# Altium PCB PCB2.PcbDoc
Units mil, origin at the board's own origin, x right, y up, seen from the top; angles counter-clockwise.
Board outline 2755.91 x 590.55 mil, 2 copper layers (Top Layer, Bottom Layer); 17 components, 19 nets, 68 pads, 14 vias.
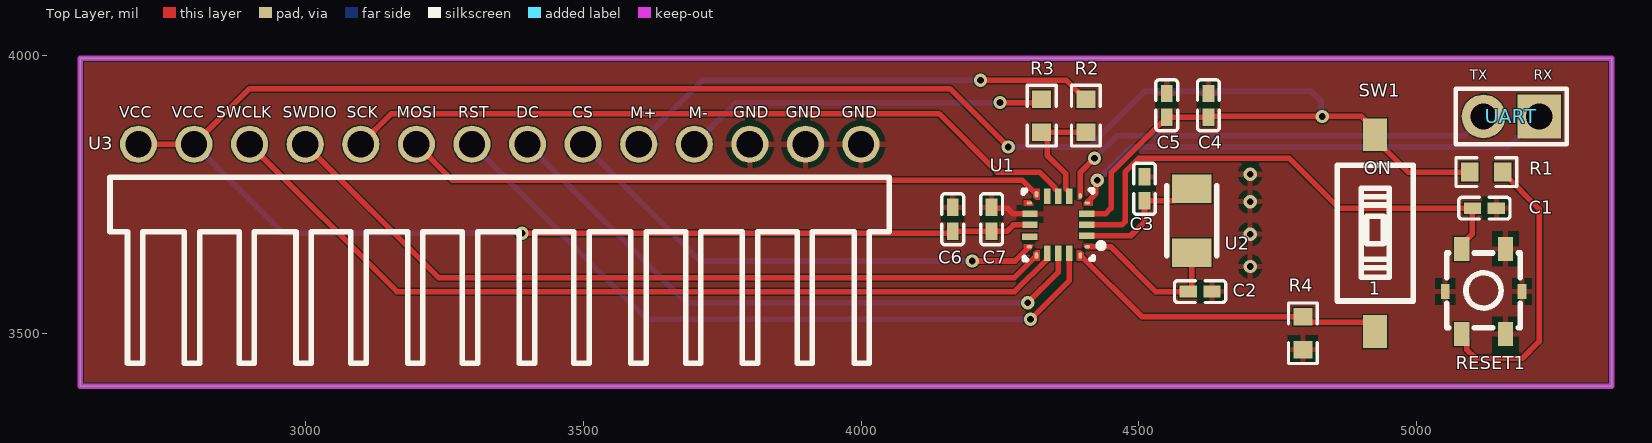
[diagram p0: Top Layer view]
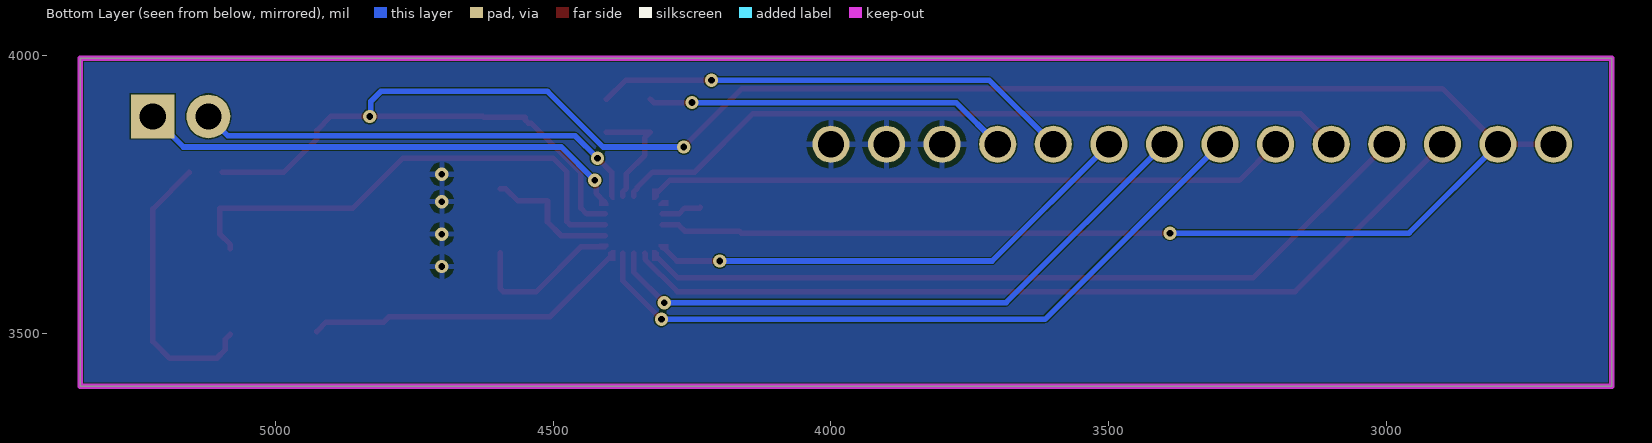
[diagram p1: Bottom Layer view, seen from below]

## Layer stack, top to bottom
Top Solder: solder mask 0.4, Solder Resist, Dk 3.5
Top Layer: signal copper 1.4
Dielectric 1: dielectric 12.6, FR-4, Dk 4.8
Bottom Layer: signal copper 1.4
Bottom Solder: solder mask 0.4, Solder Resist, Dk 3.5

## Board outline
2595,3404.45 2595,3995 5350.91,3995 5350.91,3404.45

## Design rules (kind name [scope] priority, off if disabled: settings)
Clearance [All] p1: gap=2 ignorepadtopadclearanceinfootprint=FALSE
PolygonConnect [All] p1: connectstyle=Relief reliefconductorwidth=10 reliefentries=4 polygonreliefangle="90 Angle" airgapwidth=10
RoutingVias [All] p1: holewidth=28 width=50 viastyle="Through Hole" minholewidth=28 minwidth=50 maxholewidth=28 maxwidth=50
SolderMaskExpansion [All] p1: expansion=4 istentingtop=FALSE
Width [All] p1: maxlimit=10 minlimit=10 preferedwidth=10
30 further rules are at their usual default settings.

## Components (designator, comment, footprint, x,y, rotation, side; value= is the part's Value field where it differs from the comment)
C1 "100nF" C0402 5121.46,3725 r180 top
C2 "9pF" C0402 4610,3575 r180 top
C3 "9pF" C0402 4510,3760 r270 top
C4 "100nF" C0402 4625,3910 r270 top
C5 "1uF" C0402 4550,3910 r270 top
C6 "100nF" C0402 4165,3705 r270 top
C7 "10uF" C0402 4235,3705 r270 top
R1 "10K" R0603 5125,3790 r180 top
R2 "47K" R0603 4404.54,3891.48 r90 top
R3 "22K" R0603 4325,3891.48 r270 top
R4 "10K" R0603 4795,3500 r90 top
RESET1 "Button_5P" Button_3.3x3.3mm 5120,3575 r90 top
SW1 "Switch" Switch 4925,3680 r90 top
U1 "STM32L011F4U6TR" STM32L011F4 4355,3695 r0 top
U2 "FC-135 32.7680KA-AC" CRYSTAL-SMD_L3.2-W1.5 4595,3702.4 r270 top
U3 "Pin_1*14" Pin_1*14 3350,3840 r0 top
UART "Pin_1x2" Pin1x2_2.54mm 5170,3890 r180 top

## Footprints (in the part's own frame and the unit in brackets; to place one, negate y for a bottom-side part, rotate by r counter-clockwise, add the part's x,y. Pads: shape width x height; smd on the part's side, far side on the other; paste and mask are expansions set on the pad)
Button_3.3x3.3mm [mm]
  rect 1.1x0.7 smd: 1(-1.95,1) 2(1.95,1) 3(-1.95,-1) 4(1.95,-1)
  rect 0.7x0.4 smd: 5(0,1.755) 5(0,-1.755)
  silkscreen extent -1.65,-1.67 1.76,1.68
C0402 [mm]
  rect 0.79x0.54 smd paste-100 mask+0.051: 1(-0.545,0) 2(0.545,0)
  silkscreen extent -1.17,-0.5 1.17,0.5, body extent -0.5,-0.25 0.5,0.25, height 0.25
CRYSTAL-SMD_L3.2-W1.5 [mm] "FC-135 32.7680KA-AC"
  rect 1.3x1.8 smd: 1(-1.458,0) 2(1.458,0)
  silkscreen extent -1.6,-1.14 1.6,1.14, body extent -1.6,-0.75 1.6,0.75, height 0.8
Pin1x2_2.54mm [mm]
  rect 2x2 hole 1.2: 1(-1.27,0)
  round 2 hole 1.2: 2(1.27,0)
  silkscreen extent -2.54,-1.27 2.54,1.27
Pin_1*14 [mm]
  round 1.7 hole 1.2: 1(-16.51,0) 2(-13.97,0) 3(-11.43,0) 4(-8.89,0) 5(-6.35,0) 6(-3.81,0) 7(-1.27,0) 8(1.27,0) 9(3.81,0) 10(6.35,0) 11(8.89,0) 12(11.43,0) 13(13.97,0) 14(16.51,0)
  silkscreen extent -17.81,-10 17.79,-1.5
R0603 [mil]
  rect 31.75x34.02 smd paste-3937.01 mask+2: 1(-29.66,0) 2(29.66,0)
  silkscreen extent -55,-26 55,26
STM32L011F4 [mm]
  oval 0.255x0.149 smd: 1(1.325,-0.998) 5(1.324,1.001) 11(-1.321,0.999) 15(-1.325,-1.001)
  rect 0.7x0.3 smd paste+0 mask+0.05: 2(1.301,-0.5) 3(1.301,0) 4(1.301,0.5) 12(-1.299,0.5) 13(-1.299,0) 14(-1.312,-0.55)
  oval 0.149x0.255 smd: 6(1.001,1.324)
  rect 0.3x0.7 smd paste+0 mask+0.05: 7(0.501,1.3) 8(0.001,1.3) 9(-0.499,1.3) 17(-0.499,-1.3) 18(0.001,-1.3) 19(0.501,-1.3)
  oval 0.18x0.3 smd: 10(-0.999,1.4) 16(-0.999,-1.4) 20(1.001,-1.4)
  Top Layer region: 1.575,-1.121 1.575,-0.875 1.498,-0.873 1.151,-0.873 1.151,-0.997 1.29,-1.123 1.575,-1.121
  Top Layer region: -1.571,1.123 -1.571,0.876 -1.493,0.875 -1.146,0.875 -1.146,0.998 -1.285,1.124 -1.571,1.123
  Top Layer region: -1.575,-1.125 -1.575,-0.877 -1.151,-0.877 -1.151,-1 -1.29,-1.126 -1.575,-1.125
  Top Layer region: 1.125,1.574 0.878,1.574 0.877,1.496 0.877,1.149 1,1.149 1.126,1.288 1.125,1.574
  Top Layer region: 1.574,1.124 1.574,0.878 1.497,0.876 1.15,0.876 1.15,0.999 1.289,1.125 1.574,1.124
  Top Layer region: -1.149,1.65 -0.849,1.65 -0.849,1.15 -1.029,1.15 -1.149,1.26 -1.149,1.65
  Top Layer region: -1.149,-1.65 -0.849,-1.65 -0.849,-1.15 -1.029,-1.15 -1.149,-1.26 -1.149,-1.65
  Top Layer region: 1.151,-1.65 0.851,-1.65 0.851,-1.15 1.031,-1.15 1.151,-1.26 1.151,-1.65
  silkscreen extent -1.6,-1.6 2.08,1.6
Switch [mm]
  rect 1.5x1.1 smd: 1(-4.5,0) 2(4.5,0)
  silkscreen extent -3.1,-1.74 3.1,1.74

## Part data
C1 C2 C3 C4 C5 C6 C7: library part C
R1 R2 R3 R4: library part R
U1: library part STM32L011F4

## Via types
v1: diameter 24, hole 12, Top Layer to Bottom Layer, tented both sides, 14 vias

## Nets (pads, with @x,y where several pads share a name; then routed paths per layer and width w, separated by ;. In a path a pad name is that pad's centre, name@x,y a point inside that pad or via, vN(x,y) a via of type N, cw(c..) or ccw(c..) an arc to the next point about the centre after c; other vN are vias at no path point)
ADC_IN4: R2.1 R3.2 U1.7 | length 215.8
  Top Layer w10: U1.7 4374.71,3754.06 4367.94,3760.83 4367.94,3787.06 4335,3820 4335,3851.82 R3.2 R2.1
BOOT: R4.2 SW1.1 U1.20 | length 587.7
  Top Layer w10: U1.20 4394.94,3639.88 4505.17,3529.66 R4.2 4804.66,3520 4908.35,3520 4925,3503.35 SW1.1
GND: C1.1 C2.1 C3.1 C4.1 C5.1 C6.1 C7.1 R4.1 RESET1.3 RESET1.4 RESET1.5 U1.12 U3.12 U3.13 U3.14 | length 73.7
  Top Layer w10: C7.1 4236.46,3725 4263.14,3725 4273.46,3714.68 U1.12
  other v1: 4700,3620 4700,3678.33 4700,3736.67 4700,3786
MOTOR_+: R2.2 U3.10 | length 866.2
  Top Layer w10: v1(4215,3955) 4369.55,3955 4403.41,3921.14 R2.2
  Bottom Layer w10: U3.10 3715,3955 v1(4215,3955)
MOTOR_-: R3.1 U3.11 | length 658.6
  Top Layer w10: v1(4250,3915) 4318.86,3915 R3.1
  Bottom Layer w10: U3.11 3775,3915 v1(4250,3915)
NetC2_2: C2.2 U1.1 U2.2 | length 288
  Top Layer w10: U1.1 4449.31,3655.7 4530,3575 C2.2 4589.37,3575 4595,3580.63 U2.2
NetC3_2: C3.2 U1.2 U2.1 | length 246.4
  Top Layer w10: U1.2 4485.31,3675.31 4510,3700 C3.2 4563.9,3738.54 4585.16,3759.8 U2.1
NetR1_1: R1.1 RESET1.1 | length 512.8
  Top Layer w10: RESET1.1 5089.41,3489.45 5089.41,3470.59 5105,3455 5190,3455 5220,3485 5220,3723.53 5154.66,3788.87 R1.1
RESET: C1.2 RESET1.2 U1.3 | length 914.3
  Top Layer w10: U1.3 4469.14,3695 4475,3700.86 4475,3790 4500,3815 4770,3815 4860,3725 C1.2 5100,3679.02 5080.63,3659.64 RESET1.2
SPI_CS: U1.15 U3.9 | length 901.6
  Top Layer w10: v1(4200,3630) 4277.23,3630 4300.77,3653.53 4302.81,3653.53 U1.15
  Bottom Layer w10: U3.9 3710,3630 v1(4200,3630)
SPI_DC: U1.18 U3.8 | length 1129.7
  Top Layer w10: v1(4300,3555) 4355.03,3610.03 U1.18
  Bottom Layer w10: U3.8 3685,3555 v1(4300,3555)
SPI_MOSI: U1.10 U3.6 | length 1151.1
  Top Layer w10: U3.6 3265,3775 4290.22,3775 U1.10@4314.2,3751.03
SPI_RESET: U1.19 U3.7 | length 1283.2
  Top Layer w10: v1(4305,3525) 4374.71,3594.71 U1.19
  Bottom Layer w10: U3.7 3615,3525 v1(4305,3525)
SPI_SCK: U1.8 U3.5 | length 1345.3
  Top Layer w10: U3.5 3155,3895 4140,3895 4245,3790 4321.11,3790 4348.25,3762.86 4348.25,3760.84 4355.03,3754.06 U1.8
SWCLK: U1.17 U3.3 | length 1579.4
  Top Layer w10: U3.3 3165,3575 4276.43,3575 4334.44,3633.01 4334.44,3642.92 U1.17
SWDIO: U1.16 U3.4 | length 1431.6
  Top Layer w10: U3.4 3240,3600 4275.77,3600 U1.16
UART_RX: U1.5 UART.1 | length 888.6
  Top Layer w10: U1.5@4407.14,3736.45 4422.32,3751.63 4422.32,3772.32 v1(4425,3775)
  Bottom Layer w10: v1(4425,3775) 4485,3835 5165,3835 UART.1
UART_TX: U1.6 UART.2 | length 809.5
  Top Layer w10: U1.6 4394.41,3789.41 v1(4420,3815)
  Bottom Layer w10: v1(4420,3815) 4460,3855 5085,3855 UART.2
VCC: C4.2 C5.2 C6.2 C7.2 R1.2 SW1.2 U1.4 U1.13 U3.1 U3.2 | length 4718.5
  Top Layer w10: U3.1 U3.2 2900,3940 4160,3940 v1(4265,3835) ; v1(3390,3680) 4161.46,3680 C6.2 C7.2 4262.57,3683.54 4274.03,3695 U1.13 ; U1.4 4439.68,3714.68 4450,3725 4450,3788.54 4539.45,3877.99 4544.37,3877.99 4550,3883.62 C5.2 C4.2 4626.46,3890 v1(4830,3890) 4900.04,3890 4925,3865.04 4925,3849.29 4984.29,3790 R1.2
  Bottom Layer w10: U3.2 2960,3680 v1(3390,3680) ; v1(4265,3835) 4410,3835 4510,3935 4810,3935 4828,3917 4828,3892 v1(4830,3890)
pads on no net: U1.9 U1.11 U1.14

## Polygon pours and split planes (outlines as drawn)
GND on Top Layer "GND_L01_P000" (solid, remove dead copper, pour order 0): 2595,3995 5355,3995 5355,3405 5350,3400 5345,3405 2595,3405
GND on Bottom Layer "GND_L02_P001" (solid, remove dead copper, pour order 1): 2595,3995 5355,3995 5355,3405 5350,3400 5345,3405 2595,3405

## Keep-outs
Keep-Out Layer:
  the board outline again, w10

## Silkscreen, mask and mechanical layers (free items; w line width, h text height)
Top Overlay:
  text "TX" at 5095,3950 h30
  text "RX" at 5210,3950 h30
  text "VCC" at 2665.02,3880.37 h35
  text "VCC" at 2760.02,3880.37 h35
  text "SWCLK" at 2840,3880.37 h35
  text "SWDIO" at 2960,3880.37 h35
  text "SCK" at 3075,3880.37 h35
  text "MOSI" at 3165,3880.37 h35
  text "RST" at 3275,3880.37 h35
  text "DC" at 3380,3880.37 h35
  text "CS" at 3480,3880.37 h35
  text "M+" at 3585,3880 h35
  text "M-" at 3690,3880 h35
  text "GND" at 3770,3880.37 h35
  text "GND" at 3865,3880.37 h35
  text "GND" at 3965,3880.37 h35

## Text inside footprints (layer, text, board x,y; h text height)
SW1: Top Overlay "ON" at 4904.38,3777.66 h40; Top Overlay "1" at 4913.58,3561.49 h40